# EAGLE board MD2020_02-22_pane (EAGLE 9.2.0), part 1 of 2
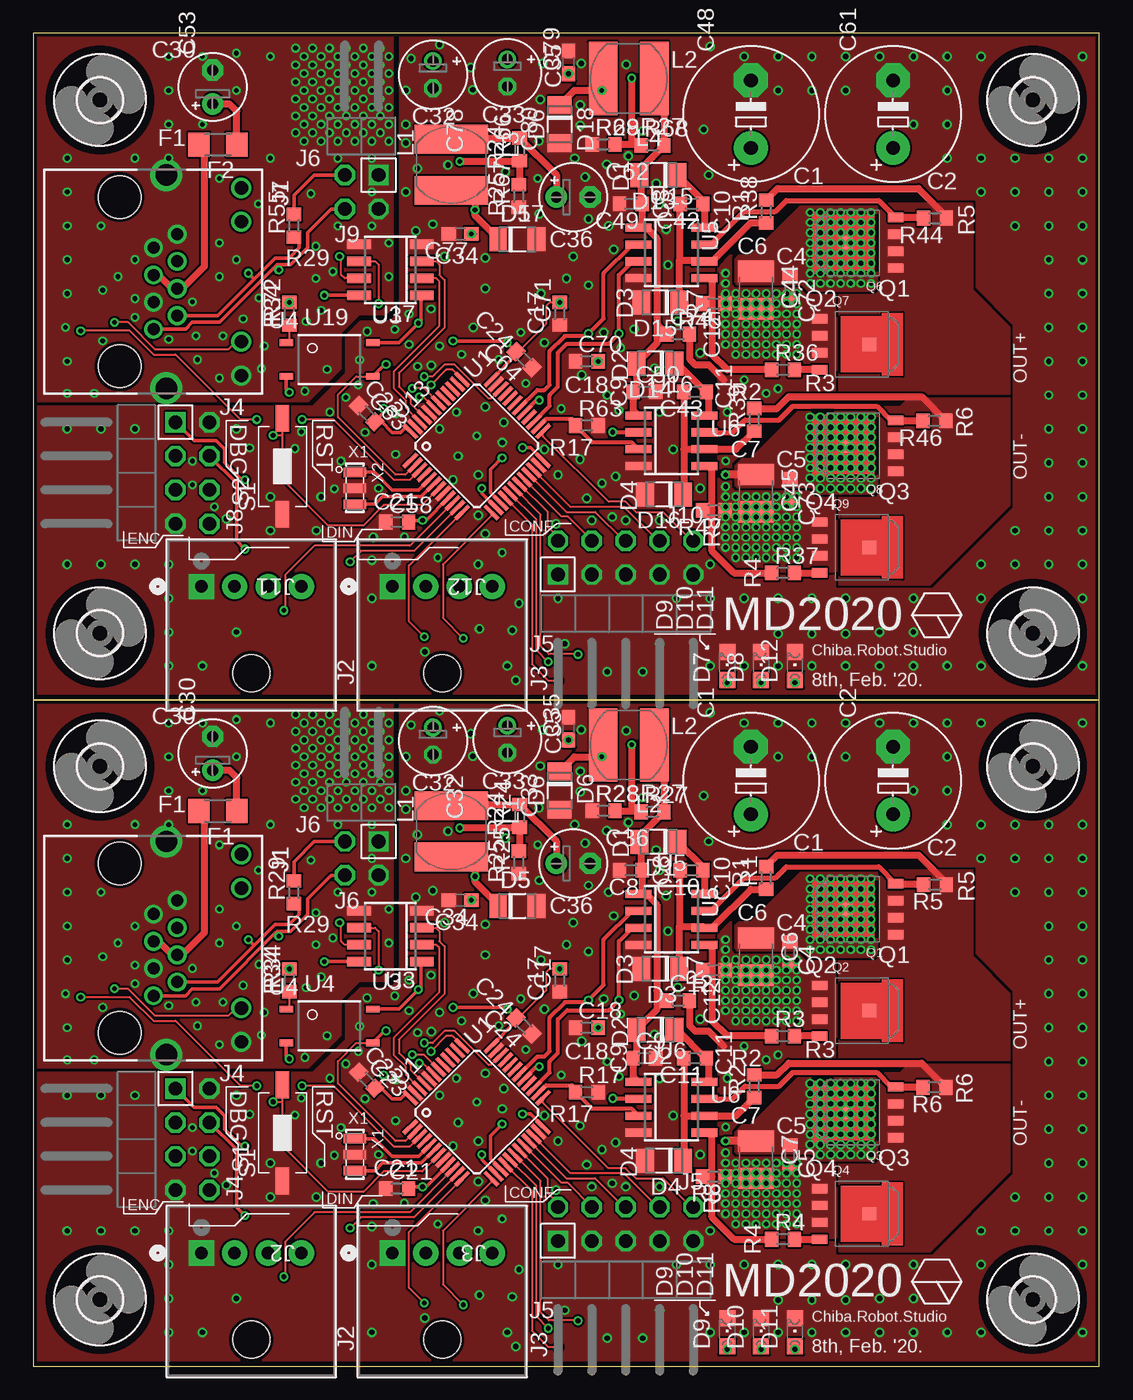
[diagram p0: board, top side]
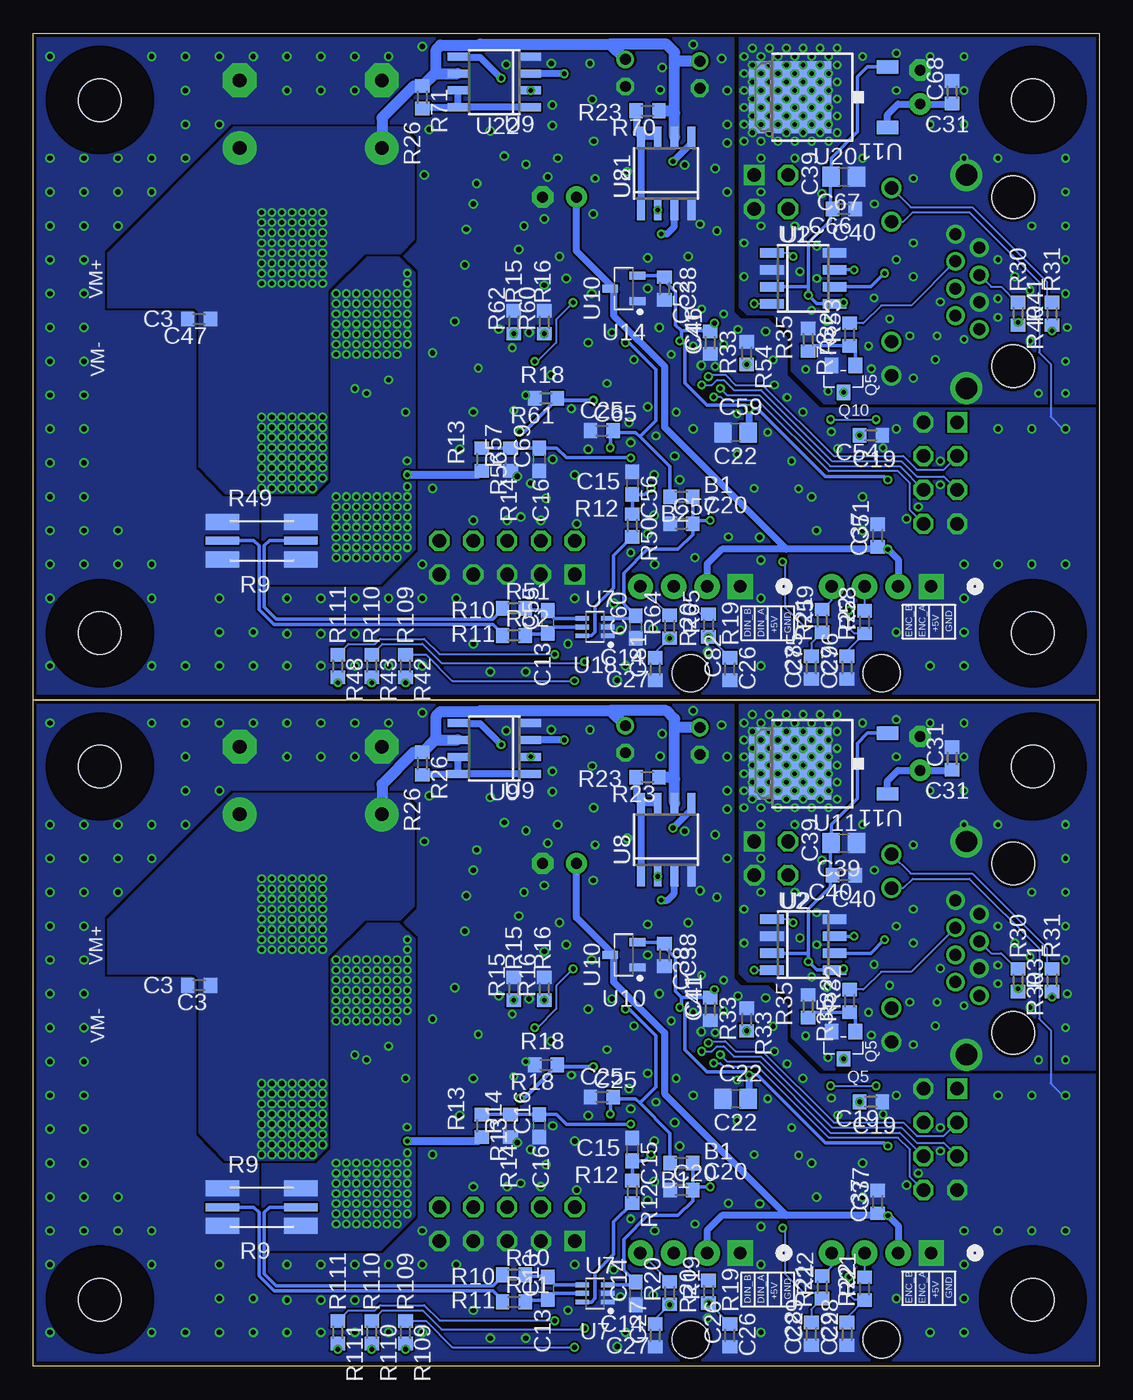
[diagram p1: board, bottom side, seen from below]

Size 80 x 100 mm. Coordinates in mm from the lower left corner, seen from the top.
Outline: 80,50 80,0 0,0 0,50
Outline: 80,50 0,50
Outline: 0,50 80,50
Outline: 80,50 80,100 0,100 0,50
Copper layers (1*16): Top 0.035mm / dielectric 1.5mm / Bottom 0.035mm
Design rules "SeeedStudio_2layer_DRU_no_angle_20140221": minimum track width 6mil, minimum drill 12mil, track to track 6mil, track to pad 6mil, pad to pad 6mil, via to via 6mil, smd to smd 0mil, copper to edge 10mil, drill to drill 10mil, minimum pad ring 10mil, minimum via ring 6mil, stop-mask expansion 2mil, vias tented up to drill 100mil, thermal gap 10mil
tKeepout: 22 lines
bKeepout: 12 lines

## Footprints (pad centres in the part's own frame; a part is rotated, then mirrored left to right if it is on the bottom)
R0603 = smd 1 x 1.1: 1 -0.85,0; 2 0.85,0
E5-10,5 = drill 1.016 pad 2.54: + -2.54,0 | drill 1.016 pad 2.54 octagon: - 2.54,0
C0603 = smd 1 x 1.1: 1 -0.85,0; 2 0.85,0
C1210 = smd 1.6 x 2.7: 1 -1.4,0; 2 1.4,0
C0603' = smd 1.1 x 1: 1 -0.85,0; 2 0.85,0
C0805 = smd 1.3 x 1.5: 1 -0.95,0; 2 0.95,0
E2,5-5 = drill 0.813 pad 1.6: + -1.27,0 | drill 0.813 pad 1.6 octagon: - 1.27,0
E2-5 = drill 0.813 pad 1.27: + -1.016,0 | drill 0.813 pad 1.27 octagon: - 1.016,0
SOD123F = smd 1.34 x 1.8: A 1.43,0; C -1.43,0
CHIPLED_0805 = smd 1.2 x 1.2: A 0,-1.05; C 0,1.05
R1206 = smd 1.6 x 1.803: 1 -1.422,0; 2 1.422,0
3,2 = hole 3.2: 0,0
8P8C-LED = drill 0.9 pad 1.3: 1 3.57,-3.81; 2 2.55,-2.03; 3 1.53,-3.81; 4 0.51,-2.03; 5 -0.51,-3.81; 6 -1.53,-2.03; 7 -2.55,-3.81; 8 -3.57,-2.03 | drill 1 pad 1.422: GA 4.5,2.78; GC 7.04,2.78; YA -7.04,2.78; YC -4.5,2.78 | drill 1.6 pad 2.184: M1 -8,-2.85; M2 8,-2.85 | hole 3.2: 6.35,-6.35; -6.35,-6.35
CONN4_1744426-4 = drill 0.94 pad 1.905 square: 1 7.493,0 | drill 0.94 pad 1.905: 2 5.004,0; 3 2.489,0; 4 0,0 | hole 2.794: 3.759,6.502
MA04-2W = drill 1.016 octagon: 1 -3.81,-1.27; 2 -3.81,1.27; 3 -1.27,-1.27; 4 -1.27,1.27; 5 1.27,-1.27; 6 1.27,1.27; 7 3.81,-1.27 | drill 1.016 square: 8 3.81,1.27
MA05-2W = drill 1.016 octagon: 1 -5.08,-1.27; 2 -5.08,1.27; 3 -2.54,-1.27; 4 -2.54,1.27; 5 0,-1.27; 6 0,1.27; 7 2.54,-1.27; 8 2.54,1.27; 9 5.08,-1.27 | drill 1.016 square: 10 5.08,1.27
MA02-2W = drill 1.016 octagon: 1 -1.27,-1.27; 2 -1.27,1.27; 3 1.27,-1.27 | drill 1.016 square: 4 1.27,1.27
L5852 = smd 2.15 x 5.5: P$1 1.925,0; P$2 -1.925,0
SOT669 = smd 1.15 x 0.7: 1 -2.725,1.905; 2 -2.725,0.635; 3 -2.725,-0.635; 4 -2.725,-1.905 | smd 1 x 1: 5 1,0
SOT-23 = smd 1.016 x 1.143: 1 -0.889,-1.016; 2 0.889,-1.016; 3 0,1.016
CSS2H-2512 = smd 2.5 x 1.2: 1$1 -2.95,1.4; 1$2 -2.95,-1.4; 2$1 2.95,1.4; 2$2 2.95,-1.4 | smd 2.5 x 0.6: 1S -2.95,0; 2S 2.95,0
SWITCH_TACTILE_3X6 = smd 2 x 1: P$1 -3.6,0; P$2 3.6,0
LQFP48 = smd 1.4 x 0.3: 1 -4.3,2.75; 2 -4.3,2.25; 3 -4.3,1.75; 4 -4.3,1.25; 5 -4.3,0.75; 6 -4.3,0.25; 7 -4.3,-0.25; 8 -4.3,-0.75; 9 -4.3,-1.25; 10 -4.3,-1.75; 11 -4.3,-2.25; 12 -4.3,-2.75; 25 4.3,-2.75; 26 4.3,-2.25; 27 4.3,-1.75; 28 4.3,-1.25; 29 4.3,-0.75; 30 4.3,-0.25; 31 4.3,0.25; 32 4.3,0.75; 33 4.3,1.25; 34 4.3,1.75; 35 4.3,2.25; 36 4.3,2.75 | smd 0.3 x 1.4: 13 -2.75,-4.3; 14 -2.25,-4.3; 15 -1.75,-4.3; 16 -1.25,-4.3; 17 -0.75,-4.3; 18 -0.25,-4.3; 19 0.25,-4.3; 20 0.75,-4.3; 21 1.25,-4.3; 22 1.75,-4.3; 23 2.25,-4.3; 24 2.75,-4.3; 37 2.75,4.3; 38 2.25,4.3; 39 1.75,4.3; 40 1.25,4.3; 41 0.75,4.3; 42 0.25,4.3; 43 -0.25,4.3; 44 -0.75,4.3; 45 -1.25,4.3; 46 -1.75,4.3; 47 -2.25,4.3; 48 -2.75,4.3
SO08 = smd 0.72 x 1.78: 1 -1.905,-2.35; 2 -0.635,-2.35; 3 0.635,-2.35; 4 1.905,-2.35; 5 1.905,2.35; 6 0.635,2.35; 7 -0.635,2.35; 8 -1.905,2.35
11-4M1S = smd 1 x 0.5: 1 -3.24,1.27; 2 -3.24,-1.27; 3 3.24,-1.27; 4 3.24,1.27
SOIC127P600X175-8 = smd 1.968 x 0.602: 1 -2.473,1.905; 2 -2.473,0.635; 3 -2.473,-0.635; 4 -2.473,-1.905; 5 2.473,-1.905; 6 2.473,-0.635; 7 2.473,0.635; 8 2.473,1.905
SOT65P210X110-6 = smd 1.02 x 0.36: 1 -0.955,0.65; 2 -0.955,0; 3 -0.955,-0.65; 4 0.955,-0.65; 5 0.955,0; 6 0.955,0.65
SOIC8 = smd 0.6 x 1.5: 1 -1.905,-2.75; 2 -0.635,-2.75; 3 0.635,-2.75; 4 1.905,-2.75; 5 1.905,2.75; 6 0.635,2.75; 7 -0.635,2.75; 8 -1.905,2.75
SOT95P240X110-3 = smd 1.18 x 0.609: 1 -1.024,0.95; 2 -1.024,-0.95; 3 1.024,0
TO252 = smd 1 x 1.6: 1 -2.28,-4.8; 2 2.28,-4.8 | smd 5.4 x 6.2: 3 0,2.5
X3-SMD-3.6X1.3X0.8MM = smd 0.7 x 1.7: 1 -1.2,0; 2 0,0; 3 1.2,0

## Placement (x,y rotation side)
B1  FERRITE_BEAD  [R0603]  31.37,15.24 180 bottom
B2  FERRITE_BEAD  [R0603]  31.37,65.24 180 bottom
C1  [E5-10,5]  53.85,43.94 90 top
C2  [E5-10,5]  64.52,43.94 90 top
C3  100n  [C0603]  67.56,28.57 180 bottom
C4  100n  [C0603]  56.77,30.99 270 top
C5  100n  [C0603]  56.77,15.75 270 top
C6  10u  [C1210]  54.23,30.73 270 top
C7  10u  [C1210]  54.23,15.49 270 top
C8  100n/50V  [C0603]  44.83,37.21 180 top
C9  100n  [C0603]  45.85,23.11 0 top
C10  100n/25V  [C0603]  49.4,37.21 180 top
C11  100n/25V  [C0603]  49.66,23.11 180 top
C12  100n/50V  [C0603]  48.39,27.43 0 top
C13  [C0603']  41.4,5.84 90 bottom
C14  [C0603']  34.8,5.46 90 bottom
C15  [C0603']  35.05,16.26 270 bottom
C16  [C0603']  42.04,18.03 90 bottom
C17  100n  [C0603]  39.5,28.96 90 top
C18  100n  [C0603]  41.53,25.4 0 top
C19  100n  [C0603]  17.14,19.84 180 bottom
C20  10n  [C0603]  31.37,13.21 0 bottom
C21  1u  [C0603]  27.3,13.34 0 top
C22  4u7  [C0805]  27.3,20.07 0 bottom
C23  100n  [C0603]  25.02,21.46 315 top
C24  100n  [C0603]  36.83,25.53 135 top
C25  100n  [C0603]  37.34,20.19 0 bottom
C26  220p  [C0603]  27.73,2.3 90 bottom
C27  220p  [C0603]  33.34,2.3 90 bottom
C28  220p  [C0603]  18.95,2.41 90 bottom
C29  220p  [C0603]  21.62,2.41 90 bottom
C30  22u  [E2,5-5]  13.46,45.97 90 top
C31  100n  [C0603]  11.05,45.59 90 bottom
C32  22u  [E2-5]  29.99,46.91 270 top
C33  22u  [E2-5]  35.57,47.04 270 top
C34  220p  [C0603']  32.02,34.96 180 top
C35  330p  [C0603']  40.16,47.83 90 top
C36  22u  [E2,5-5]  40.51,37.72 0 top
C37  100n  [C0603]  16.64,12.32 90 bottom
C38  100n  [C0603]  32.64,30.86 270 bottom
C39  10u  [C0805]  19.18,39.24 180 bottom
C40  100n  [C0603]  19.18,36.83 180 bottom
C41  100n  [C0603]  29.21,26.8 90 bottom
C42  100n/25V  [C0603]  49.4,87.21 180 top
C43  100n/25V  [C0603]  49.66,73.11 180 top
C44  10u  [C1210]  54.23,80.73 270 top
C45  10u  [C1210]  54.23,65.49 270 top
C46  100n  [C0603]  29.21,76.8 90 bottom
C47  100n  [C0603]  67.56,78.58 180 bottom
C48  [E5-10,5]  53.85,93.94 90 top
C49  100n/50V  [C0603]  44.83,87.21 180 top
C50  100n  [C0603]  45.85,73.11 0 top
C51  100n  [C0603]  16.64,62.32 90 bottom
C52  100n  [C0603]  32.64,80.86 270 bottom
C53  22u  [E2,5-5]  13.46,95.97 90 top
C54  100n  [C0603]  17.14,69.84 180 bottom
C55  [C0603']  41.4,55.84 90 bottom
C56  [C0603']  35.05,66.26 270 bottom
C57  10n  [C0603]  31.37,63.21 0 bottom
C58  1u  [C0603]  27.3,63.34 0 top
C59  4u7  [C0805]  27.3,70.07 0 bottom
C60  [C0603']  34.8,55.46 90 bottom
C61  [E5-10,5]  64.52,93.94 90 top
C62  22u  [E2,5-5]  40.51,87.72 0 top
C63  100n  [C0603]  25.02,71.46 315 top
C64  100n  [C0603]  36.83,75.53 135 top
C65  100n  [C0603]  37.34,70.19 0 bottom
C66  100n  [C0603]  19.18,86.83 180 bottom
C67  10u  [C0805]  19.18,89.24 180 bottom
C68  100n  [C0603]  11.05,95.59 90 bottom
C69  [C0603']  42.04,68.03 90 bottom
C70  100n  [C0603]  41.53,75.4 0 top
C71  100n  [C0603]  39.5,78.96 90 top
C72  100n  [C0603]  56.77,80.99 270 top
C73  100n  [C0603]  56.77,65.75 270 top
C74  100n/50V  [C0603]  48.39,77.43 0 top
C75  220p  [C0603]  21.62,52.41 90 bottom
C76  220p  [C0603]  18.95,52.41 90 bottom
C77  220p  [C0603']  32.02,84.96 180 top
C78  22u  [E2-5]  29.99,96.91 270 top
C79  330p  [C0603']  40.16,97.83 90 top
C80  22u  [E2-5]  35.57,97.04 270 top
C81  220p  [C0603]  33.34,52.3 90 bottom
C82  220p  [C0603]  27.73,52.3 90 bottom
D1  BAS70SOD-123F  [SOD123F]  46.92,39.35 180 top
D2  BAS70SOD-123F  [SOD123F]  46.68,25.21 180 top
D3  BAS70SOD-123F  [SOD123F]  47.04,29.81 180 top
D4  BAS70SOD-123F  [SOD123F]  47.32,15.41 180 top
D5  BAS70SOD-123F  [SOD123F]  36.32,34.54 0 top
D6  BAS70SOD-123F  [SOD123F]  39.5,43.18 270 top
D7  [CHIPLED_0805]  52.07,52.54 0 top
D8  [CHIPLED_0805]  54.61,52.54 0 top
D9  [CHIPLED_0805]  52.07,2.54 0 top
D10  [CHIPLED_0805]  54.61,2.54 0 top
D11  [CHIPLED_0805]  57.15,2.54 0 top
D12  [CHIPLED_0805]  57.15,52.54 0 top
D13  BAS70SOD-123F  [SOD123F]  46.92,89.35 180 top
D14  BAS70SOD-123F  [SOD123F]  46.68,75.22 180 top
D15  BAS70SOD-123F  [SOD123F]  47.04,79.81 180 top
D16  BAS70SOD-123F  [SOD123F]  47.32,65.42 180 top
D17  BAS70SOD-123F  [SOD123F]  36.32,84.54 0 top
D18  BAS70SOD-123F  [SOD123F]  39.5,93.18 270 top
F1  [R1206]  13.84,41.66 180 top
F2  [R1206]  13.84,91.66 180 top
H1  MOUNT-HOLE3.2  [3,2]  75,45 0 top
H2  MOUNT-HOLE3.2  [3,2]  75,5 0 top
H3  MOUNT-HOLE3.2  [3,2]  5,45 0 top
H4  MOUNT-HOLE3.2  [3,2]  5,5 0 top
H5  MOUNT-HOLE3.2  [3,2]  5,55 0 top
H6  MOUNT-HOLE3.2  [3,2]  75,55 0 top
H7  MOUNT-HOLE3.2  [3,2]  5,95 0 top
H8  MOUNT-HOLE3.2  [3,2]  75,95 0 top
J1  8P8C-LED  [8P8C-LED]  12.83,31.37 270 top
J2  1744426-4  [CONN4_1744426-4]  20.11,8.5 180 top
J3  1744426-4  [CONN4_1744426-4]  34.44,8.5 180 top
J4  MA04-2  [MA04-2W]  11.94,17.02 90 top
J5  MA05-2  [MA05-2W]  44.45,10.67 180 top
J6  MA02-2  [MA02-2W]  24.64,38.1 0 top
J7  8P8C-LED  [8P8C-LED]  12.83,81.37 270 top
J8  MA04-2  [MA04-2W]  11.94,67.02 90 top
J9  MA02-2  [MA02-2W]  24.64,88.1 0 top
J10  MA05-2  [MA05-2W]  44.45,60.67 180 top
J11  1744426-4  [CONN4_1744426-4]  20.11,58.5 180 top
J12  1744426-4  [CONN4_1744426-4]  34.44,58.5 180 top
L1  L5852  [L5852]  31.37,40.13 270 top
L2  L5852  [L5852]  44.68,46.61 180 top
L3  L5852  [L5852]  31.37,90.13 270 top
L4  L5852  [L5852]  44.68,96.61 180 top
Q1  N-MOSFET-  [SOT669]  61.98,34.29 180 top
Q2  N-MOSFET-  [SOT669]  61.72,26.67 0 top
Q3  N-MOSFET-  [SOT669]  61.98,19.05 180 top
Q4  N-MOSFET-  [SOT669]  61.72,11.43 0 top
Q5  2N7002  [SOT-23]  19.2,24.08 180 bottom
Q6  N-MOSFET-  [SOT669]  61.98,84.29 180 top
Q7  N-MOSFET-  [SOT669]  61.72,76.67 0 top
Q8  N-MOSFET-  [SOT669]  61.98,69.05 180 top
Q9  N-MOSFET-  [SOT669]  61.72,61.43 0 top
Q10  2N7002  [SOT-23]  19.2,74.08 180 bottom
R1  10  [R0603]  54.98,36.63 90 top
R2  10  [R0603]  54.09,21.01 90 top
R3  10  [R0603]  56.26,24.77 0 top
R4  10  [R0603]  56.26,9.53 0 top
R5  10k  [R0603]  67.66,36.14 180 top
R6  10k  [R0603]  67.62,20.92 180 top
R7  10k  [R0603]  51.05,29.72 180 top
R8  10k  [R0603]  51.05,14.22 180 top
R9  0.5m  [CSS2H-2512]  62.87,11.94 0 bottom
R10  [R0603]  43.94,6.86 0 bottom
R11  [R0603]  43.94,4.83 0 bottom
R12  10  [R0603]  35.05,13.08 270 bottom
R13  10  [R0603]  46.35,18.03 270 bottom
R14  10  [R0603]  44.2,18.03 90 bottom
R15  10k  [R0603]  43.94,28.32 90 bottom
R16  10k  [R0603]  41.66,28.32 90 bottom
R17  10k  [R0603]  41.53,20.57 0 top
R18  10k  [R0603]  41.53,22.61 180 bottom
R19  100R  [R0603]  29.34,5.59 90 bottom
R20  100R  [R0603]  32.26,5.49 90 bottom
R21  100R  [R0603]  17.63,5.82 90 bottom
R22  100R  [R0603]  20.8,5.92 90 bottom
R23  0.47R  [R0603]  33.91,44.2 180 bottom
R24  3.6k  [R0603]  36.49,41.3 90 top
R25  1.2k  [R0603]  36.42,37.79 90 top
R26  0.47R  [R0603]  50.8,45.21 270 bottom
R27  10k  [R0603]  46.48,41.59 0 top
R28  1k  [R0603]  42.79,41.67 0 top
R29  120  [R0603]  19.56,35.56 90 top
R30  4k7  [R0603]  6.1,28.96 270 bottom
R31  470  [R0603]  3.56,28.96 90 bottom
R32  1k  [R0603]  18.75,27.41 90 bottom
R33  1k  [R0603]  26.47,26.01 270 bottom
R34  1k  [R0603]  19.2,28.96 90 top
R35  10k  [R0603]  21.87,27.01 270 bottom
R36  10  [R0603]  56.26,74.77 0 top
R37  10  [R0603]  56.26,59.52 0 top
R38  10  [R0603]  54.98,86.64 90 top
R39  10  [R0603]  54.09,71.01 90 top
R40  4k7  [R0603]  6.1,78.96 270 bottom
R41  470  [R0603]  3.56,78.96 90 bottom
R42  10k  [R0603]  52.07,52.54 270 bottom
R43  1k  [R0603]  54.61,52.54 270 bottom
R44  10k  [R0603]  67.66,86.14 180 top
R45  10k  [R0603]  51.05,79.72 180 top
R46  10k  [R0603]  67.62,70.92 180 top
R47  10k  [R0603]  51.05,64.22 180 top
R48  1k  [R0603]  57.15,52.54 270 bottom
R49  0.5m  [CSS2H-2512]  62.87,61.94 0 bottom
R50  10  [R0603]  35.05,63.08 270 bottom
R51  [R0603]  43.94,56.86 0 bottom
R52  [R0603]  43.94,54.83 0 bottom
R53  1k  [R0603]  18.75,77.41 90 bottom
R54  1k  [R0603]  26.47,76.01 270 bottom
R55  120  [R0603]  19.56,85.56 90 top
R56  10  [R0603]  46.35,68.03 270 bottom
R57  10  [R0603]  44.2,68.03 90 bottom
R58  100R  [R0603]  17.63,55.82 90 bottom
R59  100R  [R0603]  20.8,55.92 90 bottom
R60  10k  [R0603]  41.66,78.32 90 bottom
R61  10k  [R0603]  41.53,72.61 180 bottom
R62  10k  [R0603]  43.94,78.32 90 bottom
R63  10k  [R0603]  41.53,70.57 0 top
R64  100R  [R0603]  32.26,55.49 90 bottom
R65  100R  [R0603]  29.34,55.59 90 bottom
R66  3.6k  [R0603]  36.49,91.3 90 top
R67  1.2k  [R0603]  36.42,87.79 90 top
R68  10k  [R0603]  46.48,91.58 0 top
R69  1k  [R0603]  42.79,91.67 0 top
R70  0.47R  [R0603]  33.91,94.2 180 bottom
R71  0.47R  [R0603]  50.8,95.21 270 bottom
R72  1k  [R0603]  19.2,78.96 90 top
R73  10k  [R0603]  21.87,77.01 270 bottom
R109  10k  [R0603]  52.07,2.54 270 bottom
R110  1k  [R0603]  54.61,2.54 270 bottom
R111  1k  [R0603]  57.15,2.54 270 bottom
S1  SWITCH_TACTILETOP  [SWITCH_TACTILE_3X6]  18.7,17.51 90 top
S2  SWITCH_TACTILETOP  [SWITCH_TACTILE_3X6]  18.7,67.51 90 top
U1  STM32F103C8  [LQFP48]  33.27,19.05 45 top
U2  NCV7351D1E  [SO08]  22.23,31.62 270 bottom
U3  SI8621AB-B-IS  [SO08]  26.8,32.26 90 top
U4  TLP184  [11-4M1S]  22.23,25.53 0 top
U5  NCP5106D  [SOIC127P600X175-8]  47.88,33.53 0 top
U6  NCP5106D  [SOIC127P600X175-8]  47.88,19.43 0 top
U7  NCS199  [SOT65P210X110-6]  37.85,5.46 180 bottom
U8  MC34063AD  [SOIC8]  32.51,39.5 0 bottom
U9  MC34063AD  [SOIC8]  45.42,46.35 90 bottom
U10  XC6206  [SOT95P240X110-3]  35.69,30.86 180 bottom
U11  7805DT  [TO252]  20.7,45.21 90 bottom
U12  NCV7351D1E  [SO08]  22.23,81.62 270 bottom
U13  STM32F103C8  [LQFP48]  33.27,69.05 45 top
U14  XC6206  [SOT95P240X110-3]  35.69,80.86 180 bottom
U15  NCP5106D  [SOIC127P600X175-8]  47.88,83.53 0 top
U16  NCP5106D  [SOIC127P600X175-8]  47.88,69.43 0 top
U17  SI8621AB-B-IS  [SO08]  26.8,82.26 90 top
U18  NCS199  [SOT65P210X110-6]  37.85,55.46 180 bottom
U19  TLP184  [11-4M1S]  22.23,75.53 0 top
U20  7805DT  [TO252]  20.7,95.21 90 bottom
U21  MC34063AD  [SOIC8]  32.51,89.5 0 bottom
U22  MC34063AD  [SOIC8]  45.42,96.36 90 bottom
X1  8MHZ  [X3-SMD-3.6X1.3X0.8MM]  24.13,15.88 270 top
X2  8MHZ  [X3-SMD-3.6X1.3X0.8MM]  24.13,65.88 270 top

## Library data of the parts
B1 B2 C1 C2 C20 C30 C32 C33 C36 C48 C53 C57 C61 C62 C78 C80 = rcl
C3-C5 C8-C12 C17-C19 C23-C25 C31 C37 C38 C40-C43 C46 C47 C49-C52 C54 C63-C66 C68 C70-C74 = rcl; MPN: CC0603KRX7R9BB104
C6 C7 C44 C45 = rcl; MPN: CL31A106KBHNNNE
C13-C16 C55 C56 C60 C69 = rcl; SPICEPREFIX: C
C21 C58 = rcl; MPN: CC0603KRX7R8BB105
C22 C59 = rcl; MPN: CC0603KRX5R6BB475
C26-C29 C75 C76 C81 C82 = rcl; MPN: CL10B221KB8NNNC
C34 C77 = rcl; MPN: CL10B221KB8NNNC; SPICEPREFIX: C
C35 C79 = rcl; MPN: CL10B331KB8NNNC; SPICEPREFIX: C
C39 C67 = rcl; MPN: CC0805ZKY5V6BB106
D1-D6 D13-D18 = diode; MPN: PMEG4010EH,115
D7-D12 = led
F1 F2 R10 R11 R51 R52 = rcl; SPICEPREFIX: R
H1-H8 = holes
J1 J7 = con-rj45; OC_FARNELL: unknown; OC_NEWARK: unknown
J2 J3 J11 J12 = EP2.5; MANUFACTURER_PART_NUMBER: 17444264; VENDOR: TE Connectivity
J4-J6 J8-J10 = con-headers
L1-L4 = l_ysk
Q1-Q4 Q6-Q9 = nexperia
Q5 Q10 = OPL_Discrete_Semiconductor; MPN: 2N7002,215
R1-R4 R12-R14 R36-R39 R50 R56 R57 = rcl; MPN: RC0603FR-0710RL
R5-R8 R15-R18 R42 R44-R47 R60-R63 R109 = rcl; MPN: RC0603FR-0710KL
R9 R49 = r_shunt
R19-R22 R58 R59 R64 R65 = rcl; MPN: RC0603JR-07100RL
R23 R26 R70 R71 = rcl; MPN: 0603WAF470LT5E; SPICEPREFIX: R
R24 R66 = rcl; MPN: RC0603JR-073K6L; SPICEPREFIX: R
R25 R67 = rcl; MPN: RC0603JR-071K2L; SPICEPREFIX: R
R27 R35 R68 R73 = rcl; MPN: RC0603FR-0710KL; SPICEPREFIX: R
R28 R32-R34 R53 R54 R69 R72 = rcl; MPN: RC0603FR-071KL; SPICEPREFIX: R
R29 R55 = rcl; MPN: RC0603JR-07120RL; SPICEPREFIX: R
R30 R40 = rcl; MPN: RC0603FR-074K7L; SPICEPREFIX: R
R31 R41 = rcl; MPN: RC0603JR-07470RL; SPICEPREFIX: R
R43 R48 R110 R111 = rcl; MPN: RC0603FR-071KL
S1 S2 = switch-tactile
U1 U13 = stm32_mcu; MPN: STM32F103C8T6
U2 U5-U7 U12 U15 U16 U18 = on-semi
U3 U17 = silabs
U4 U19 = md201x
U8 U9 U21 U22 = mc34063; MPN: MC34063ADR2G
U10 U14 = torex
U11 U20 = linear
X1 X2 = OPL_Crystal Oscillator; MPN: CSTCE8M00G55-RO

## Nets
3V3A: B1.1 C14.2 C20.2 C21.2 U1.9 U7.3
3V3A1: B2.1 C57.2 C58.2 C60.2 U13.9 U18.3
5V_ISO: C39.2 C40.2 R34.2 U2.3 U2.5 U3.8 U11.2
5V_ISO1: C66.2 C67.2 R72.2 U12.3 U12.5 U17.8 U20.2
24V_ISO: C30.+ C31.1 F1.1 U11.1
24V_ISO1: C53.+ C68.1 F2.1 U20.1
!EMS: R33.2 U1.2 U4.3
!EMS1: R54.2 U13.2 U19.3
!EMS_ISO: J1.6 R32.2
!EMS_ISO1: J7.6 R53.2
!RESET: C19.2 S1.P$2 U1.7
!RESET1: C54.2 S2.P$2 U13.7
+3V1: B2.2 C46.2 C52.1 C59.2 C63.2 C64.2 C65.2 C70.2 C71.2 J8.8 U13.24 U13.36 U13.48 U14.2 U17.1 U19.4
+3V3: B1.2 C17.2 C18.2 C22.2 C23.2 C24.2 C25.2 C38.1 C41.2 J4.8 U1.24 U1.36 U1.48 U3.1 U4.4 U10.2
+5V: C36.+ C37.1 J2.2 J3.2 J4.5 L1.P$2 R24.2 U10.3
+5V1: C51.1 C62.+ J8.5 J11.2 J12.2 L3.P$2 R66.2 U14.3
+15V: C8.1 C9.1 C12.1 D1.A D2.A L2.P$2 R27.2 U5.1 U6.1
+15V1: C49.1 C50.1 C74.1 D13.A D14.A L4.P$2 R68.2 U15.1 U16.1
A_OUT: Q1.1 Q1.2 Q1.3 Q2.5 R1.2 R5.1
A_OUT1: Q6.1 Q6.2 Q6.3 Q7.5 R38.2 R44.1
B_OUT: Q3.1 Q3.2 Q3.3 Q4.5 R2.2 R6.1
B_OUT1: Q8.1 Q8.2 Q8.3 Q9.5 R39.2 R46.1
CANH: J1.1 J6.1 U2.7
CANH1: J7.1 J9.1 U12.7
CANL: J1.2 R29.1 U2.6
CANL1: J7.2 R55.1 U12.6
CANRX: U1.45 U3.3
CANRX1: U13.45 U17.3
CANTX: U1.46 U3.2
CANTX1: U13.46 U17.2
ENC_A: C28.2 R21.1 U1.10
ENC_A1: C76.2 R58.1 U13.10
ENC_B: C29.2 R22.1 U1.11
ENC_B1: C75.2 R59.1 U13.11
GNDA: C1.- C2.- C3.2 C8.2 C9.2 C14.1 C15.1 C16.1 C17.1 C18.1 C19.1 C20.1 C21.1 C22.1 C23.1 C24.1 C25.1 C26.1 C27.1 C28.1 C29.1 C32.- C33.- C34.2 C35.2 C36.- C37.2 C38.2 C41.1 D3.A D4.A D5.A D6.A D9.C D10.C D11.C J1.YC J2.1 J3.1 J4.2 J4.7 J5.2 J5.4 J5.6 J5.8 J5.10 R9.1$1 R9.1$2 R14.1 R15.2 R16.2 R17.2 R18.2 R25.1 R28.1 R33.1 S1.P$1 U1.8 U1.23 U1.35 U1.44 U1.47 U3.4 U5.4 U6.4 U7.1 U7.2 U8.4 U9.4 U10.1 X1.2
GNDA1: C46.1 C47.2 C48.- C49.2 C50.2 C51.2 C52.2 C54.1 C56.1 C57.1 C58.1 C59.1 C60.1 C61.- C62.- C63.1 C64.1 C65.1 C69.1 C70.1 C71.1 C75.1 C76.1 C77.2 C78.- C79.2 C80.- C81.1 C82.1 D7.C D8.C D12.C D15.A D16.A D17.A D18.A J7.YC J8.2 J8.7 J10.2 J10.4 J10.6 J10.8 J10.10 J11.1 J12.1 R49.1$1 R49.1$2 R54.1 R57.1 R60.2 R61.2 R62.2 R63.2 R67.1 R69.1 S2.P$1 U13.8 U13.23 U13.35 U13.44 U13.47 U14.1 U15.4 U16.4 U17.4 U18.1 U18.2 U21.4 U22.4 X2.2
GNDIO: C30.- C31.2 C39.1 C40.1 J1.3 J1.7 J1.8 J1.GC J1.M1 J1.M2 J6.3 J6.4 Q5.2 R35.1 U2.2 U2.8 U3.5 U11.3
GNDIO1: C53.- C66.1 C67.1 C68.2 J7.3 J7.7 J7.8 J7.GC J7.M1 J7.M2 J9.3 J9.4 Q10.2 R73.1 U12.2 U12.8 U17.5 U20.3
IN_A: C26.2 R19.1 U1.12
IN_A1: C82.2 R65.1 U13.12
IN_B: C27.2 R20.1 U1.13
IN_B1: C81.2 R64.1 U13.13
IN_HI_A: R16.1 U1.30 U5.2
IN_HI_A1: R60.1 U13.30 U15.2
IN_HI_B: R18.1 U1.29 U6.2
IN_HI_B1: R61.1 U13.29 U16.2
IN_LO_A: R15.1 U1.27 U5.3
IN_LO_A1: R62.1 U13.27 U15.3
IN_LO_B: R17.1 U1.26 U6.3
IN_LO_B1: R63.1 U13.26 U16.3
ISENSE: C15.2 R12.1 U1.14
ISENSE1: C56.2 R50.1 U13.14
JMP0: J5.9 U1.19
JMP1: J5.7 U1.20
JMP2: J5.5 U1.21
JMP3: J5.3 U1.22
JMP4: J5.1 U1.25
JMP5: J10.9 U13.19
JMP6: J10.7 U13.20
JMP7: J10.5 U13.21
JMP8: J10.3 U13.22
JMP9: J10.1 U13.25
LED0: R109.1 U1.16
LED1: R110.1 U1.17
LED2: R111.1 U1.18
LED3: R48.1 U13.18
LED4: R42.1 U13.16
LED5: R43.1 U13.17
LED_CAN: R31.1 U1.3
LED_CAN1: R41.1 U13.3
N$1: Q1.4 R5.2 U5.7
N$2: Q3.4 R6.2 U6.7
N$3: D10.A R110.2
N$4: C10.2 D3.C R1.1 U5.6
N$5: R4.1 R8.2 U6.5
N$6: R12.2 U7.6
N$7: D9.A R109.2
N$8: F1.2 J1.4 J1.5 R30.1
N$9: J6.2 R29.2
N$10: U1.6 X1.3
N$11: R3.1 R7.2 U5.5
N$12: J2.4 R22.2
N$13: R23.2 U8.1 U8.7 U8.8
N$14: D5.C L1.P$1 U8.2
N$15: J3.4 R20.2
N$16: J2.3 R21.2
N$17: J3.3 R19.2
N$18: J1.GA R30.2
N$19: U1.5 X1.1
N$20: J1.YA R31.2
N$21: D11.A R111.2
N$22: Q5.1 R32.1 R35.2
N$23: U2.1 U3.7
N$24: C34.1 U8.3
N$25: C11.2 D4.C R2.1 U6.6
N$26: R24.1 R25.2 U8.5
N$27: U2.4 U3.6
N$28: R26.2 U9.1 U9.7 U9.8
N$29: D6.C L2.P$1 U9.2
N$30: Q5.3 U4.2
N$31: R34.1 U4.1
N$32: C35.1 U9.3
N$33: R27.1 R28.2 U9.5
N$34: Q7.4 R36.2
N$35: Q9.4 R37.2
N$36: C13.2 R10.2 U7.4
N$37: C13.1 R11.2 U7.5
N$38: C43.1 D14.C U16.8
N$39: C42.1 D13.C U15.8
N$40: R37.1 R47.2 U16.5
N$41: Q6.4 R44.2 U15.7
N$42: Q8.4 R46.2 U16.7
N$43: D8.A R43.2
N$44: D7.A R42.2
N$45: U13.6 X2.3
N$46: U13.5 X2.1
N$47: R36.1 R45.2 U15.5
N$48: F2.2 J7.4 J7.5 R40.1
N$49: D12.A R48.2
N$50: U12.1 U17.7
N$51: U12.4 U17.6
N$52: R50.2 U18.6
N$53: J7.GA R40.2
N$54: J7.YA R41.2
N$55: C55.2 R51.2 U18.4
N$56: C55.1 R52.2 U18.5
N$57: J9.2 R55.2
N$58: J12.4 R64.2
N$59: J12.3 R65.2
N$60: J11.4 R59.2
N$61: Q2.4 R3.2
N$62: J11.3 R58.2
N$63: C42.2 D15.C R38.1 U15.6
N$64: Q4.4 R4.2
N$65: C43.2 D16.C R39.1 U16.6
N$66: R70.2 U21.1 U21.7 U21.8
N$67: C11.1 D2.C U6.8
N$68: D17.C L3.P$1 U21.2
N$69: C77.1 U21.3
N$70: R66.1 R67.2 U21.5
N$71: R71.2 U22.1 U22.7 U22.8
N$72: D18.C L4.P$1 U22.2
N$73: C10.1 D1.C U5.8
N$74: C79.1 U22.3
N$75: R68.1 R69.2 U22.5
N$76: Q10.1 R53.1 R73.2
N$77: Q10.3 U19.2
N$78: R72.1 U19.1
SWCLK: J4.4 U1.37
SWCLK1: J8.4 U13.37
SWDIO: J4.6 U1.34
SWDIO1: J8.6 U13.34
UART_RX: J4.1 U1.43
UART_RX1: J8.1 U13.43
UART_TX: J4.3 U1.42
UART_TX1: J8.3 U13.42
VCC: C1.+ C2.+ C3.1 C4.1 C5.1 C6.1 C7.1 C32.+ C33.+ Q1.5 Q3.5 R13.2 R23.1 R26.1 U8.6 U9.6
VCC1: C44.1 C45.1 C47.1 C48.+ C61.+ C72.1 C73.1 C78.+ C80.+ Q6.5 Q8.5 R56.2 R70.1 R71.1 U21.6 U22.6
VCS: C4.2 C5.2 C6.2 C7.2 C12.2 Q2.1 Q2.2 Q2.3 Q4.1 Q4.2 Q4.3 R7.1 R8.1 R9.2$1 R9.2$2
VCS1: C44.2 C45.2 C72.2 C73.2 C74.2 Q7.1 Q7.2 Q7.3 Q9.1 Q9.2 Q9.3 R45.1 R47.1 R49.2$1 R49.2$2
VCS_B_N: R9.1S R11.1
VCS_B_N1: R49.1S R52.1
VCS_B_P: R9.2S R10.1
VCS_B_P1: R49.2S R51.1
VSENSE: C16.2 R13.1 R14.2 U1.15
VSENSE1: C69.2 R56.1 R57.2 U13.15